# EAGLE board top (EAGLE 7.2.0)
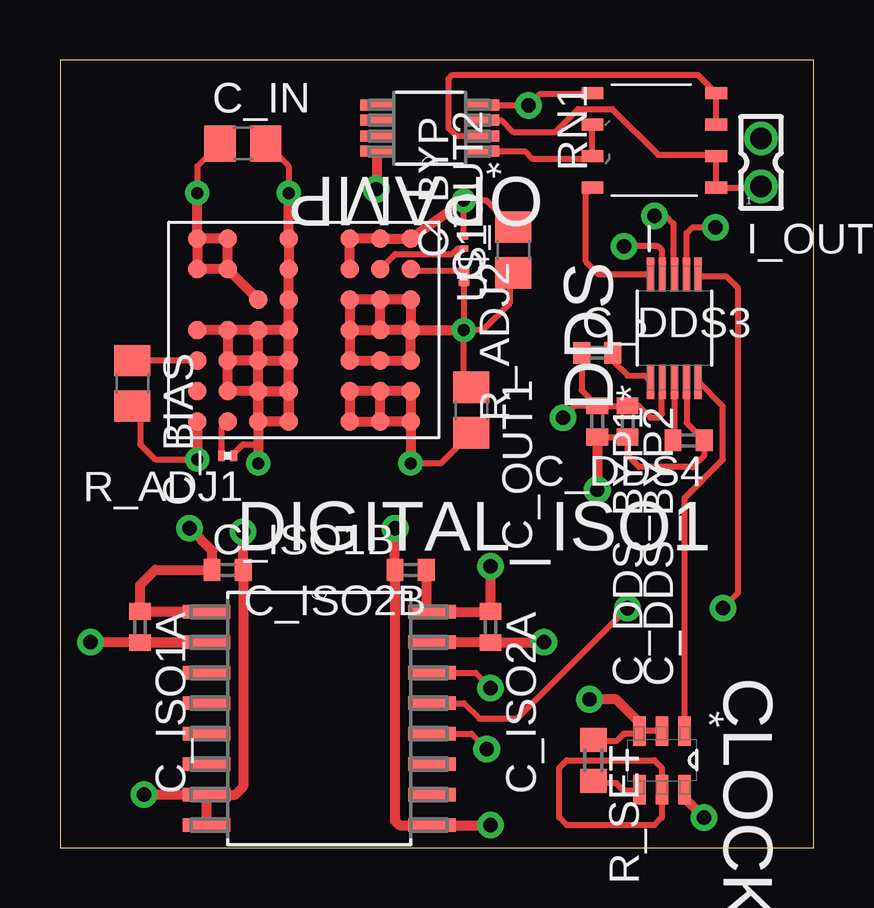
[diagram p0: board, top side]
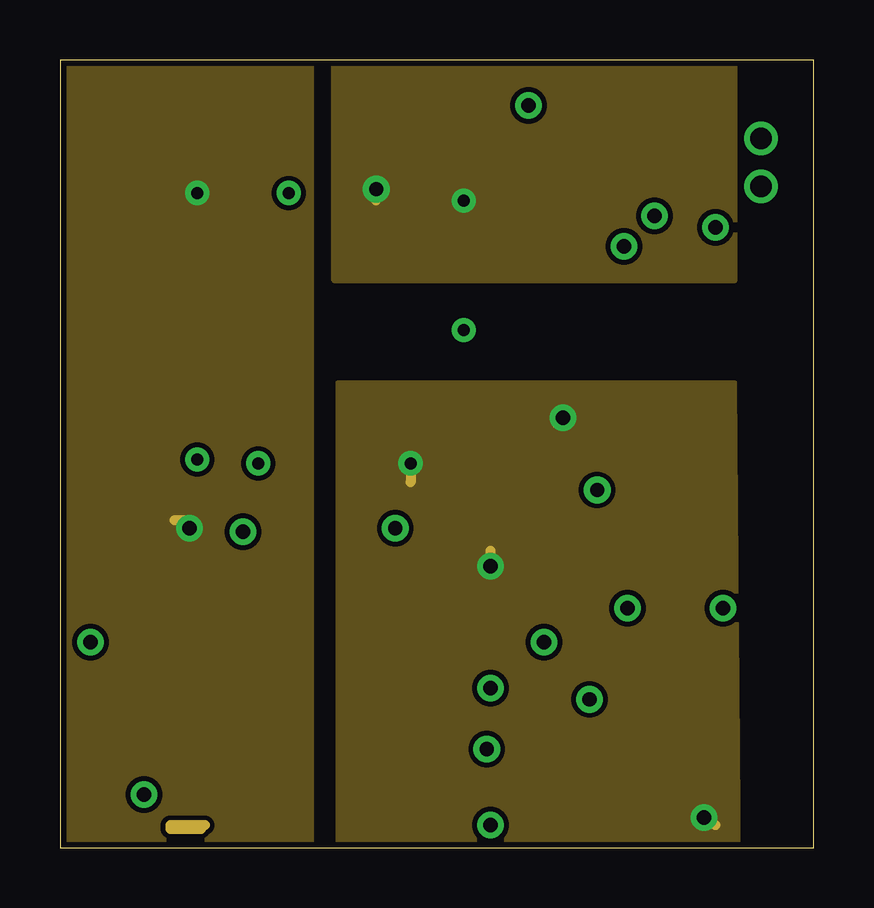
[diagram p1: board, inner layer Vdd]
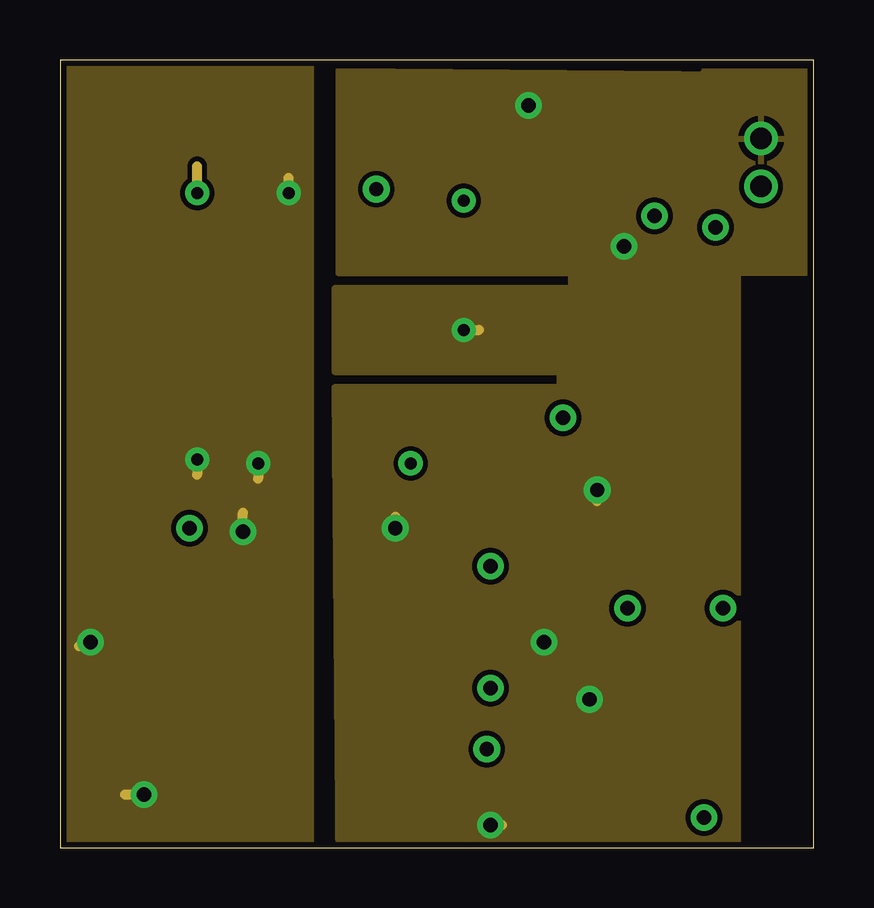
[diagram p2: board, inner layer Gnd]
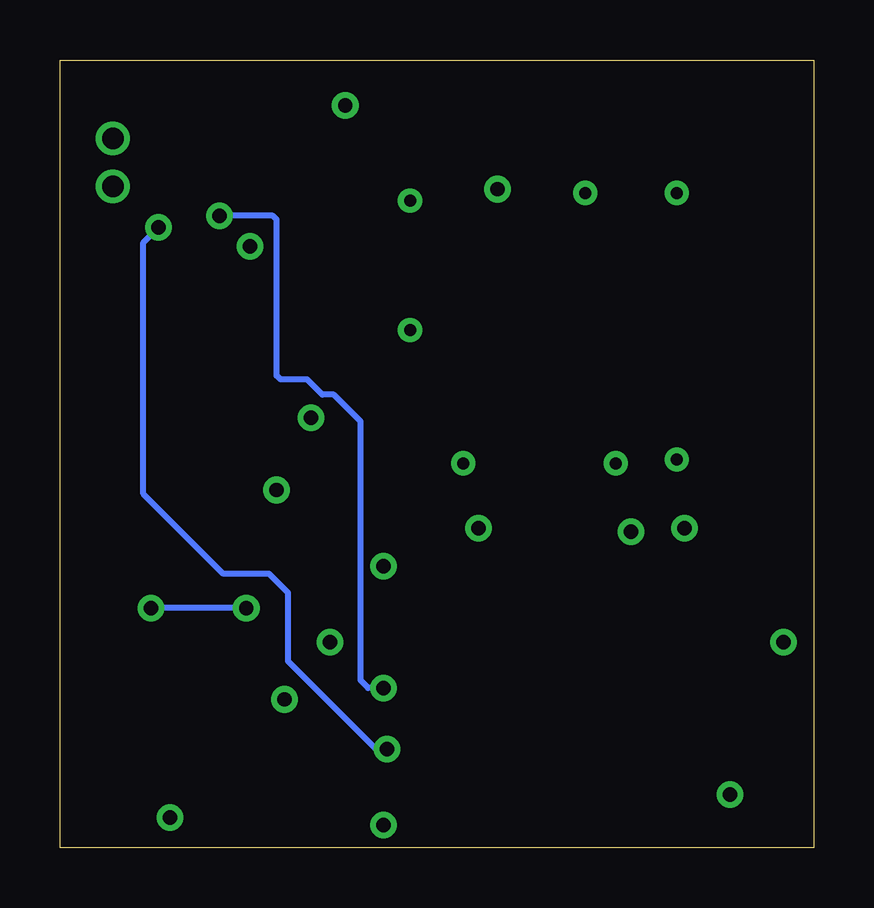
[diagram p3: board, bottom side, seen from below]

Size 31.41 x 32.85 mm. Coordinates in mm from the lower left corner, seen from the top.
Outline: 0,0 31.41,0 31.41,32.85 0,32.85 0,0
Copper layers (1*2*15*16): Top 0.035mm / dielectric 1.5mm / Vdd 0.035mm / dielectric 0.15mm / Gnd 0.035mm / dielectric 0.2mm / Bottom 0.035mm
Design rules "pcbtrain *": minimum track width 0.2mm, minimum drill 0.4mm, track to track 0.2mm, track to pad 0.2mm, pad to pad 0.2mm, via to via 0.2mm, smd to smd 0mil, copper to edge 10mil, drill to drill 0.2mm, minimum pad ring 10mil, minimum via ring 10mil, stop-mask expansion 0.125mm, vias tented up to drill 0mil, thermal gap 10mil
Net classes: 0 default: clearance 0.205 mm

## Footprints (pad centres in the part's own frame; a part is rotated, then mirrored left to right if it is on the bottom)
C0805 = smd 1.3 x 1.5: 1 -0.95,0; 2 0.95,0
C0201 = smd 0.25 x 0.35: 1 -0.25,0; 2 0.25,0
C0402 = smd 0.7 x 0.9: 1 -0.65,0; 2 0.65,0
SOT95P280X100-6N = smd 1.219 x 0.508: 1 -1.219,0.94; 2 -1.219,0; 3 -1.219,-0.94; 4 1.219,-0.94; 5 1.219,0; 6 1.219,0.94
SOP50P490X110-10N = smd 1.422 x 0.305: 1 -2.235,0.991; 2 -2.235,0.508; 3 -2.235,0; 4 -2.235,-0.508; 5 -2.235,-0.991; 6 2.235,-0.991; 7 2.235,-0.508; 8 2.235,0; 9 2.235,0.508; 10 2.235,0.991
SOIC127P1032X265-16N = smd 1.981 x 0.559: 1 -4.699,4.445; 2 -4.699,3.175; 3 -4.699,1.905; 4 -4.699,0.635; 5 -4.699,-0.635; 6 -4.699,-1.905; 7 -4.699,-3.175; 8 -4.699,-4.445; 9 4.699,-4.445; 10 4.699,-3.175; 11 4.699,-1.905; 12 4.699,-0.635; 13 4.699,0.635; 14 4.699,1.905; 15 4.699,3.175; 16 4.699,4.445
332-02 = drill 0.9 pad 1.27: 1 0,-1; 2 0,1
SOP65P490X109-8N = smd 1.372 x 0.457: 1 -2.21,0.965; 2 -2.21,0.33; 3 -2.21,-0.33; 4 -2.21,-0.965; 5 2.21,-0.965; 6 2.21,-0.33; 7 2.21,0.33; 8 2.21,0.965
R0201 = smd 0.28 x 0.43: 1 -0.255,0; 2 0.255,0
R0603 = smd 1 x 1.1: 1 -0.85,0; 2 0.85,0
CTS742C083 = smd 0.5 x 0.9: 1 -2.47,-3.848; 2 -1.162,-3.848; 3 0.146,-3.848; 4 1.454,-3.848; 5 1.454,1.308; 6 0.146,1.308; 7 -1.162,1.308; 8 -2.47,1.308
BGA-49 = smd 0.78 x 0.78: ADJ1 3.81,-3.175; ADJ2 -2.54,4.445; BIAS 1.27,-4.445; BYP -2.54,3.175; GND@1 -3.81,-0.635; GND@2 -2.54,-0.635; GND@3 -1.27,-0.635; GND@4 0,-0.635; GND@5 1.27,-0.635; GND@6 2.54,-0.635; GND@7 3.81,-0.635; GND@8 0,-1.905; GND@9 1.27,-1.905; GND@10 2.54,-1.905; GND@11 3.81,-1.905; GND@12 0,-3.175; GND@13 1.27,-3.175; GND@14 2.54,-3.175; GND@15 0,-4.445; GND@16 3.81,-4.445; RUN -1.27,-1.905; SS 2.54,-4.445; VIN@1 -3.81,-3.175; VIN@2 -2.54,-3.175; VIN@3 -3.81,-4.445; VIN@4 -2.54,-4.445; VOUT1@1 2.54,4.445; VOUT1@2 2.54,3.175; VOUT1@3 2.54,1.905; VOUT1@4 3.81,4.445; VOUT1@5 3.81,3.175; VOUT1@6 3.81,1.905; VOUT2@1 -3.81,4.445; VOUT2@2 -3.81,3.175; VOUT2@3 -3.81,1.905; VOUT2@4 -2.54,1.905; VOUT-@1 -1.27,4.445; VOUT-@2 -1.27,3.175; VOUT-@3 -1.27,1.905; VOUT-@4 0,4.445; VOUT-@5 0,3.175; VOUT-@6 0,1.905; VOUT-@7 1.27,4.445; VOUT-@8 1.27,3.175; VOUT-@9 1.27,1.905

## Placement (x,y rotation side)
C_BIAS  4.7u  [C0805]  3.02,19.37 270 top
C_BYP  0.01u  [C0201]  16.83,25.24 90 top
C_DDS3  10n  [C0402]  22.38,20.64 0 top
C_DDS4  100n  [C0402]  26.19,16.99 180 top
C_DDS_BYP1  0.1u  [C0402]  22.38,17.78 270 top
C_DDS_BYP2  10u  [C0402]  23.65,17.78 270 top
C_IN  2.2u  [C0805]  7.62,29.37 0 top
C_ISO1A  1u  [C0402]  3.33,9.21 270 top
C_ISO1B  0.1u  [C0402]  6.99,11.59 0 top
C_ISO2A  1u  [C0402]  17.94,9.21 270 top
C_ISO2B  0.1u  [C0402]  14.61,11.59 180 top
C_OUT1  47u  [C0805]  17.14,18.26 270 top
C_OUT2  10u  [C0805]  18.89,24.92 90 top
CLOCK  LTC6906IS6PBF  [SOT95P280X100-6N]  25.08,3.65 270 top
DDS  AD9833BRMZ  [SOP50P490X110-10N]  25.6,21.67 90 top
DIGITAL_ISO1  ADUM1410ARWZ  [SOIC127P1032X265-16N]  10.79,5.4 0 top
I_OUT  332-02  [332-02]  29.21,28.58 0 top
OPAMP  LMC6482IMM  [SOP65P490X109-8N]  15.4,30 180 top
R_ADJ1  9.1k  [R0201]  6.99,16.35 180 top
R_ADJ2  300k  [R0201]  16.83,23.81 270 top
R_SET  200k  [R0603]  22.23,3.65 270 top
RN1  CTS742C083  [CTS742C083]  23.5,30 90 top
U$1  LTM8048  [BGA-49]  10.16,21.59 270 top

## Library data of the parts
C_BIAS C_BYP C_DDS3 C_DDS4 C_DDS_BYP1 C_DDS_BYP2 C_IN C_ISO1A C_ISO1B C_ISO2A C_ISO2B C_OUT1 C_OUT2 R_ADJ1 R_ADJ2 R_SET = resistor
CLOCK = LTC6906; MPN: LTC6906IS6#PBF; OC_FARNELL: 1432109; OC_NEWARK: 10R6975; PACKAGE: TSOT-23-6; SUPPLIER: Linear Technology
DDS = ad9833; MPN: AD9833BRMZ; OC_FARNELL: 1581966; OC_NEWARK: 19M1014; PACKAGE: MSOP-10; SUPPLIER: Analog Devices
DIGITAL_ISO1 = SwitchBoard; MPN: ADUM1410ARWZ; OC_FARNELL: 2067770; OC_NEWARK: 73T8174; PACKAGE: 16-Lead SOIC_W; SUPPLIER: Analog Devices
I_OUT = con-garry
OPAMP = LMC6482; MPN: LMC6482IMM; OC_FARNELL: 1468890; OC_NEWARK: 83F3826; PACKAGE: MSOP-8; SUPPLIER: NationalSemiconductor
RN1 = resistor-net; OC_FARNELL: unknown; OC_NEWARK: unknown
U$1 = LTM8048

## Nets
CLK_OUT: CLOCK.1 DDS.5
COMP: C_DDS3.2 DDS.1
FSYNC: DDS.8 DIGITAL_ISO1.14
FSYNC_IN: DIGITAL_ISO1.3
GND: C_BIAS.2 C_IN.2 C_ISO1A.2 C_ISO1B.2 DIGITAL_ISO1.2 DIGITAL_ISO1.7 DIGITAL_ISO1.8 R_ADJ1.1 U$1.GND@1 U$1.GND@2 U$1.GND@3 U$1.GND@4 U$1.GND@5 U$1.GND@6 U$1.GND@7 U$1.GND@8 U$1.GND@9 U$1.GND@10 U$1.GND@11 U$1.GND@12 U$1.GND@13 U$1.GND@14 U$1.GND@15 U$1.GND@16
GND_CS: C_DDS4.1 C_DDS_BYP1.2 C_DDS_BYP2.2 C_ISO2A.2 C_ISO2B.2 C_OUT1.1 C_OUT2.1 CLOCK.2 CLOCK.3 DDS.4 DDS.9 DIGITAL_ISO1.9 DIGITAL_ISO1.15 I_OUT.2 OPAMP.4 R_ADJ2.2 R_SET.1 RN1.5 U$1.VOUT-@1 U$1.VOUT-@2 U$1.VOUT-@3 U$1.VOUT-@4 U$1.VOUT-@5 U$1.VOUT-@6 U$1.VOUT-@7 U$1.VOUT-@8 U$1.VOUT-@9
IOUT: I_OUT.1 OPAMP.3 RN1.1 RN1.2
N$1: C_DDS4.2 DDS.3
N$2: C_BYP.1 U$1.BYP
N$3: OPAMP.2 RN1.3 RN1.4
N$7: OPAMP.1 RN1.6 RN1.7
N$8: CLOCK.4 R_SET.2
N$10: C_BIAS.1 U$1.BIAS
N$11: R_ADJ1.2 U$1.ADJ1
N$13: R_ADJ2.1 U$1.ADJ2
SCLK: DDS.7 DIGITAL_ISO1.12
SCLK_IN: DIGITAL_ISO1.5
SDATA: DDS.6 DIGITAL_ISO1.13
SDATA_IN: DIGITAL_ISO1.4
V_SINE: DDS.10 RN1.8
VDD: C_IN.1 C_ISO1A.1 C_ISO1B.1 DIGITAL_ISO1.1 U$1.RUN U$1.VIN@1 U$1.VIN@2 U$1.VIN@3 U$1.VIN@4
VDD_CS_ANA: C_BYP.2 C_OUT2.2 OPAMP.8 U$1.VOUT2@1 U$1.VOUT2@2 U$1.VOUT2@3 U$1.VOUT2@4
VDD_CS_DIG: C_DDS3.1 C_DDS_BYP1.1 C_DDS_BYP2.1 C_ISO2A.1 C_ISO2B.1 C_OUT1.2 CLOCK.6 DDS.2 DIGITAL_ISO1.16 U$1.VOUT1@1 U$1.VOUT1@2 U$1.VOUT1@3 U$1.VOUT1@4 U$1.VOUT1@5 U$1.VOUT1@6

## Tracks (layer width: path | path; a pad name or v marks a point on that pad's centre or on a via)
CLK_OUT
  Top 0.254: 26.67,19.35 DDS.5 27.62,18.4 27.62,16.19 26.02,14.59 CLOCK.1
COMP
  Top 0.254: C_DDS3.2 23.03,20.3 23.65,19.68 24.36,19.68 DDS.1
FSYNC  (via drill 0.6)
  Top 0.254: DIGITAL_ISO1.14 17.3,7.3 v17.94,6.67 | v24.77,26.35 25.24,26.35 25.56,26.03 25.56,23.94 DDS.8
  Bottom 0.254: v17.94,6.67 18.57,6.67 18.89,6.98 18.89,17.78 20,18.89 20.48,18.89 21.11,19.53 22.23,19.53 22.38,19.68 22.38,26.19 22.54,26.35 v24.77,26.35
GND  (via drill 0.5, 0.6)
  Top 0.254: C_BIAS.2 3.33,18.1 3.33,16.83 3.97,16.19 v5.71,16.19 | C_IN.2 9.53,28.41 v9.53,27.3 | R_ADJ1.1 7.24,16.45 7.62,16.83 8.26,16.83
  Top 0.406: U$1.GND@7 U$1.GND@11 U$1.GND@10 | U$1.GND@10 U$1.GND@6 U$1.GND@7 | U$1.GND@7 U$1.GND@5 | U$1.GND@5 U$1.GND@4 | U$1.GND@4 U$1.GND@8 | U$1.GND@8 U$1.GND@12 | U$1.GND@12 U$1.GND@15 | U$1.GND@12 U$1.GND@13 | U$1.GND@10 U$1.GND@14 U$1.GND@13 | U$1.GND@10 U$1.GND@9 | U$1.GND@9 U$1.GND@8 | U$1.GND@9 U$1.GND@13 | U$1.GND@10 8.26,16.83 v8.26,16.03 | U$1.GND@16 v5.71,16.19 | U$1.GND@4 U$1.GND@3 U$1.GND@2 U$1.GND@1 v9.53,27.3 | C_ISO1A.2 6.08,8.56 DIGITAL_ISO1.2 v1.27,8.57 | DIGITAL_ISO1.7 7.3,2.22 7.63,2.55 C_ISO1B.2 v7.62,13.18 | DIGITAL_ISO1.7 v3.49,2.22 | DIGITAL_ISO1.7 DIGITAL_ISO1.8 | U$1.GND@9 U$1.GND@5
  Gnd 0.406: v8.26,16.03 8.26,15.4 | v5.71,16.19 5.71,15.56 | v9.53,27.3 9.53,27.94 | v7.62,13.18 7.62,13.97 | v3.49,2.22 2.7,2.22 | v1.27,8.57 0.95,8.57 0.79,8.41
  pour Gnd: 10.48,33.5 -1.43,33.5 -0.64,-0.79 10.48,-0.79
GND_CS  (via drill 0.5, 0.6)
  Top 0.254: R_ADJ2.2 v16.83,21.59 | C_OUT1.1 16.83,19.52 v16.83,21.59 | C_OUT2.1 18.73,23.81 18.73,22.7 17.62,21.59 v16.83,21.59 | C_DDS_BYP1.2 C_DDS_BYP2.2 23.65,16.35 24.13,15.87 26.35,15.87 26.84,16.37 C_DDS4.1 26.11,17.72 DDS.4 | R_SET.1 22.28,4.44 23.18,4.44 23.5,4.76 24.04,4.76 CLOCK.3 CLOCK.2 | OPAMP.4 v19.54,30.97 | RN1.5 22.16,31.43 20,31.43 v19.54,30.97 | v19.54,30.97 v19.53,30.96 | DDS.9 25.09,24.92 24.92,25.08 v23.5,25.08
  Top 0.406: U$1.VOUT-@2 U$1.VOUT-@1 U$1.VOUT-@4 | U$1.VOUT-@2 U$1.VOUT-@3 U$1.VOUT-@6 | U$1.VOUT-@6 U$1.VOUT-@9 U$1.VOUT-@8 U$1.VOUT-@7 U$1.VOUT-@4 | U$1.VOUT-@4 U$1.VOUT-@5 | U$1.VOUT-@6 U$1.VOUT-@5 | U$1.VOUT-@5 U$1.VOUT-@2 | U$1.VOUT-@4 v16.83,21.59 | DIGITAL_ISO1.9 14.13,0.95 13.96,1.13 C_ISO2B.2 13.96,13.32 v13.97,13.33 | DIGITAL_ISO1.9 16.19,0.95 | CLOCK.3 24.14,5.23 23.18,6.19 v22.07,6.19 | C_DDS_BYP1.2 v22.38,14.92 | v20.16,8.57 20.15,8.56 C_ISO2A.2 16.05,8.56 16.03,8.57 DIGITAL_ISO1.15 | DIGITAL_ISO1.9 v17.94,0.95
  Gnd 0.254: v19.53,30.96 19.53,30.64 | v23.5,25.08 23.18,25.08
  Gnd 0.406: v16.83,21.59 17.46,21.59 | v22.07,6.19 21.75,6.19 | v22.38,14.92 22.38,14.45 | v20.16,8.57 20.32,8.57 | v13.97,13.33 13.97,13.81 | v17.94,0.95 18.41,0.95
  pour Gnd: 11.43,19.21 11.59,-0.95 28.26,-0.95 28.26,19.21
  pour Gnd: 11.43,19.84 20.8,19.84 20.8,18.42 28.26,18.1 28.26,32.23 11.59,32.38 11.59,23.97 21.27,23.97 21.27,23.34 11.43,23.34
  pour Gnd: 26.83,32.38 31.27,32.38 31.27,23.97 26.83,23.97
IOUT
  Top 0.254: OPAMP.3 18.4,30.33 18.89,29.84 20.64,29.84 21.59,30.8 23.02,30.8 24.92,28.89 27.29,28.89 RN1.2 RN1.1 29.17,27.53 I_OUT.1
N$1
  Top 0.254: DDS.3 25.6,17.04 C_DDS4.2
N$2
  Top 0.254: U$1.BYP 13.97,24.76 16.35,24.76 16.58,24.99 C_BYP.1
N$3
  Top 0.254: RN1.3 RN1.4 26.57,32.23 16.35,32.23 16.19,32.07 16.19,30 16.52,29.67 OPAMP.2
N$4
  Top 0.254: 25.08,2.22 25.08,1.27 24.77,0.95 21.11,0.95 20.8,1.27 20.8,3.33 21.11,3.65 24.77,3.65 25.08,3.33 25.08,2.7
N$5
  Vdd 0.406: 6.03,0.95 4.6,0.95 4.6,0.79 5.87,0.79
N$7
  Top 0.254: RN1.6 RN1.7 22.08,28.73 19.68,28.73 19.38,29.04 OPAMP.1
N$8
  Top 0.254: CLOCK.4 24.09,2.38 23.5,2.38 23.18,2.7 22.33,2.7 R_SET.2
N$10
  Top 0.254: U$1.BIAS C_BIAS.1
N$11
  Top 0.254: 7.05,17.72 U$1.ADJ1 6.73,17.52 R_ADJ1.2
N$13
  Top 0.254: U$1.ADJ2 14.67,24.07 R_ADJ2.1
SCLK  (via drill 0.6)
  Top 0.254: DIGITAL_ISO1.12 17.14,4.76 v17.78,4.13 | DDS.7 26.11,25.63 26.35,25.88 v27.3,25.88
  Bottom 0.254: v17.78,4.13 18.26,4.13 21.91,7.78 21.91,10.64 22.7,11.43 24.61,11.43 27.94,14.76 27.94,25.24 v27.3,25.88
SDATA  (via drill 0.6)
  Top 0.254: DIGITAL_ISO1.13 16.83,6.03 17.46,5.4 19.05,5.4 v23.65,10 | v27.62,10 28.26,10.64 28.26,23.34 27.78,23.81 26.68,23.81 DDS.6
  Bottom 0.254: v23.65,10 v27.62,10
V_SINE
  Top 0.254: DDS.10 22.45,23.9 21.91,24.45 21.91,27.25 RN1.8
VDD  (via drill 0.5, 0.6)
  Top 0.254: C_IN.1 5.71,28.41 v5.71,27.3
  Top 0.406: U$1.VIN@2 U$1.VIN@4 U$1.VIN@3 | U$1.VIN@1 U$1.VIN@3 | U$1.VIN@2 6.99,25.56 6.83,25.4 U$1.VIN@3 | U$1.RUN U$1.VIN@2 | U$1.VIN@3 v5.71,27.3 | DIGITAL_ISO1.1 6.08,9.86 C_ISO1A.1 3.33,10.95 3.97,11.59 C_ISO1B.1 6.35,11.6 6.35,12.38 v5.4,13.33
  Vdd 0.406: v5.4,13.33 5.4,13.65 4.76,13.65
  Gnd 0.406: v5.71,27.3 5.71,28.42
  pour Vdd: 10.48,33.5 -1.43,33.5 -0.64,11.59 -0.64,-0.79 10.48,-0.79
VDD_CS_ANA  (via drill 0.5, 0.6)
  Top 0.254: C_BYP.2 v16.83,26.99 17.78,26.99 C_OUT2.2
  Top 0.406: U$1.VOUT2@4 U$1.VOUT2@3 U$1.VOUT2@2 U$1.VOUT2@1 v16.83,26.99 | OPAMP.8 13.19,27.48 v13.18,27.46
  Vdd 0.406: v13.18,27.46 13.18,26.99
  pour Vdd: 11.43,23.65 11.43,32.7 28.1,32.7 28.1,23.65
VDD_CS_DIG  (via drill 0.5, 0.6)
  Top 0.254: C_OUT1.2 15.87,16.03 v14.61,16.03 | DDS.2 25.08,19.43 25.08,18.1 24.92,17.94 24.61,17.94 24.11,18.43 C_DDS_BYP2.1 C_DDS_BYP1.1 21.73,19.08 | C_DDS3.1 21.73,19.08 | 21.73,19.08 22.38,18.41 21.43,18.41 v20.95,17.94
  Top 0.406: U$1.VOUT1@5 U$1.VOUT1@6 U$1.VOUT1@3 U$1.VOUT1@2 | U$1.VOUT1@4 U$1.VOUT1@5 | U$1.VOUT1@2 U$1.VOUT1@1 U$1.VOUT1@4 | U$1.VOUT1@5 U$1.VOUT1@2 | U$1.VOUT1@4 v14.61,16.03 | CLOCK.6 26.02,2.08 v26.83,1.27 | v17.94,11.75 C_ISO2A.1 17.92,9.84 DIGITAL_ISO1.16 15.26,10.08 C_ISO2B.1
  Vdd 0.254: v20.95,17.94 20.64,17.62
  Vdd 0.406: v14.61,16.03 14.61,15.24 | v26.83,1.27 26.99,1.27 27.3,0.95 | v17.94,11.75 17.94,12.38
  pour Vdd: 11.59,19.37 11.59,-0.95 28.26,-0.95 28.1,19.37